# Altium PCB Power_Amplifier.PcbDoc
Units mm, origin at the board's own origin, x right, y up, seen from the top; angles counter-clockwise.
Board outline 101.09 x 78.99 mm, 4 copper layers (Top Layer, Layer 1, Layer 2, Bottom Layer), stack 1.5 mm thick; 51 components, 33 nets, 120 pads, 4 vias.
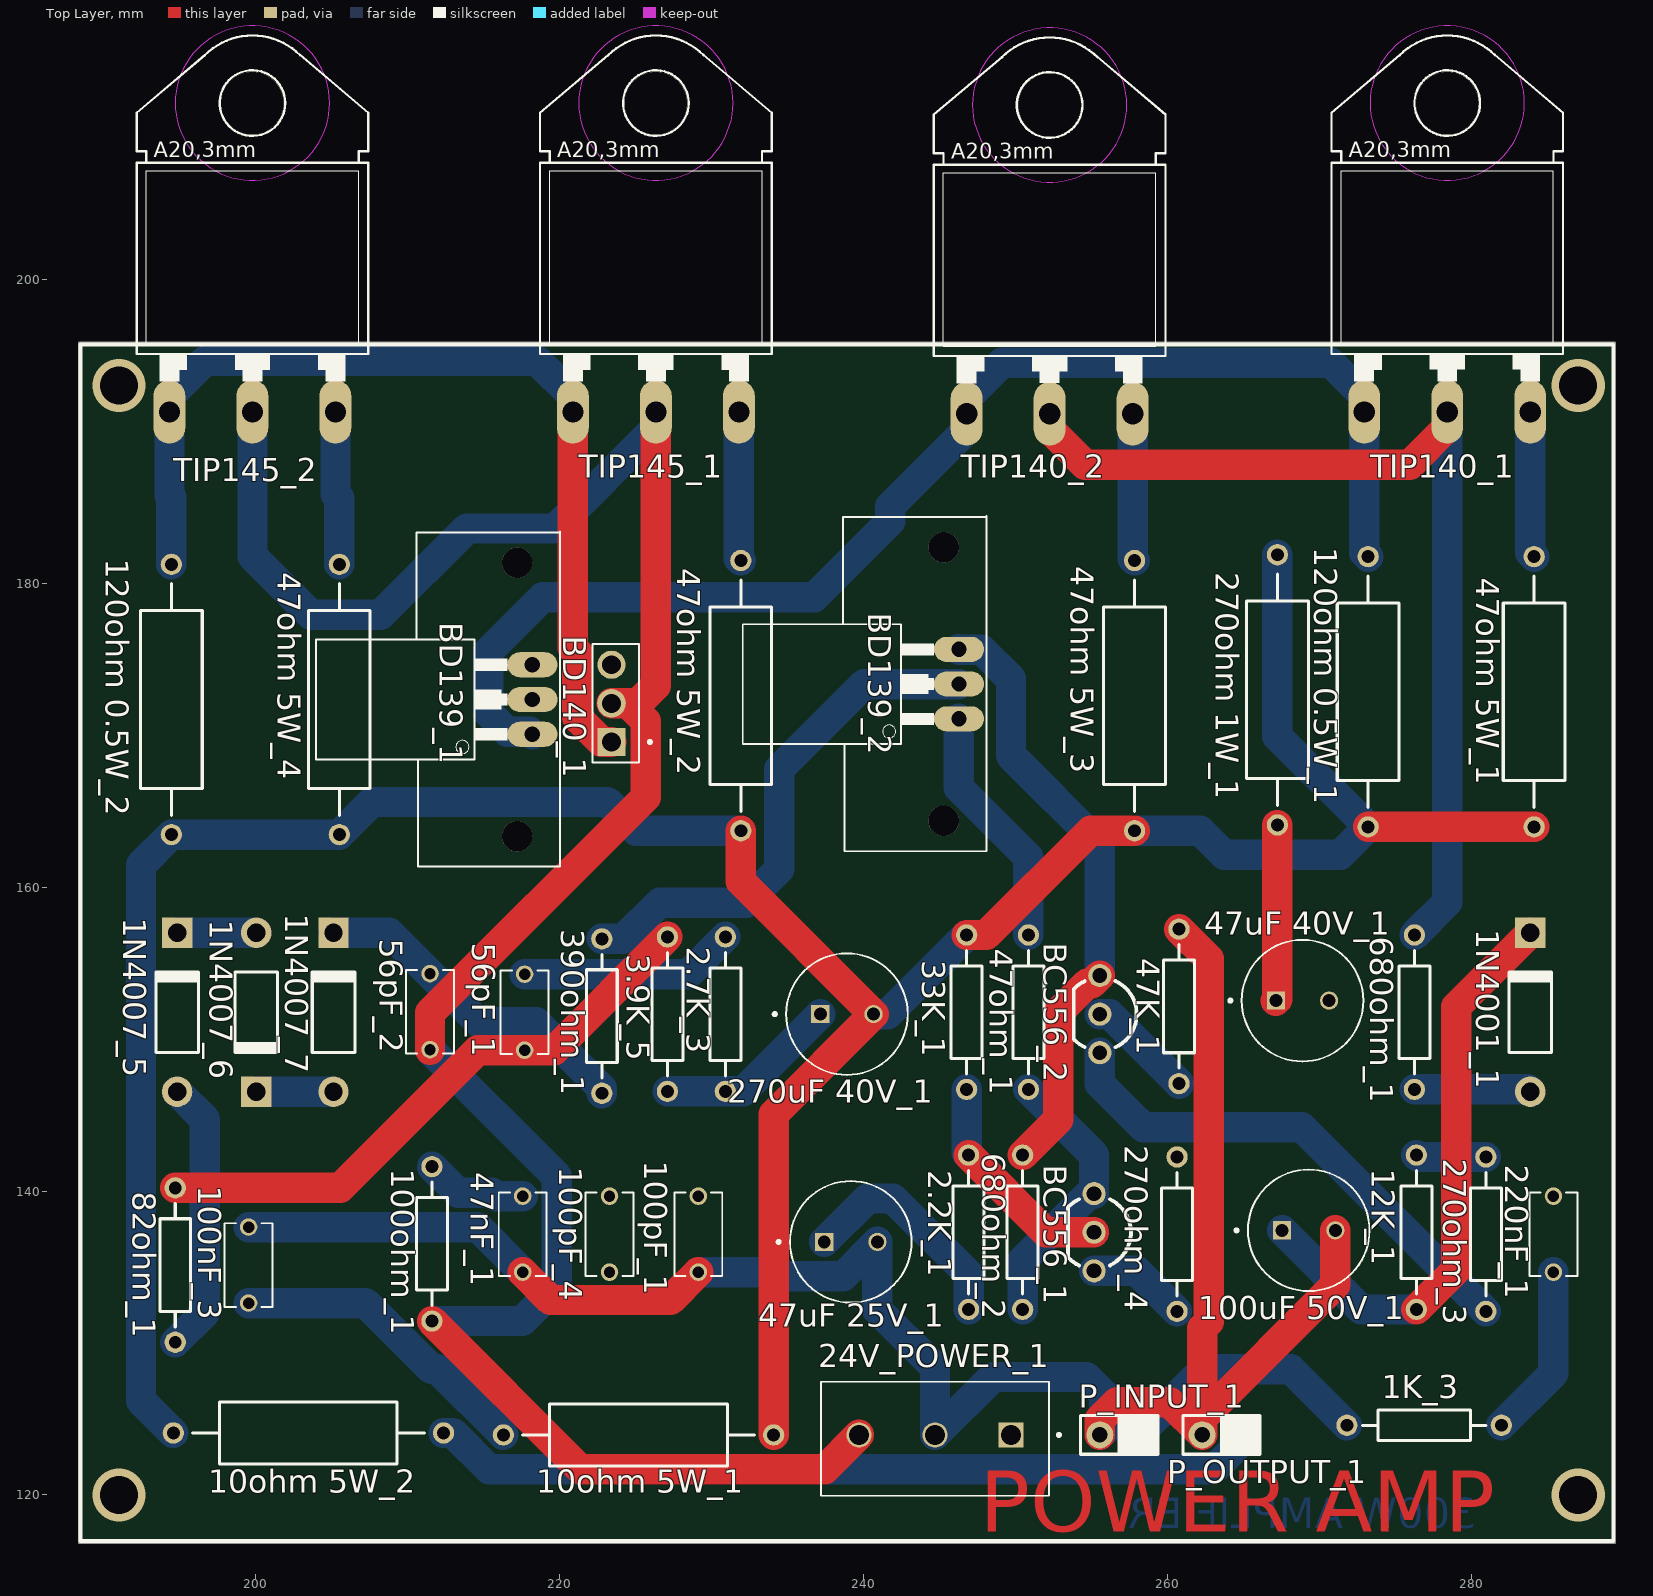
[diagram p0: Top Layer view]
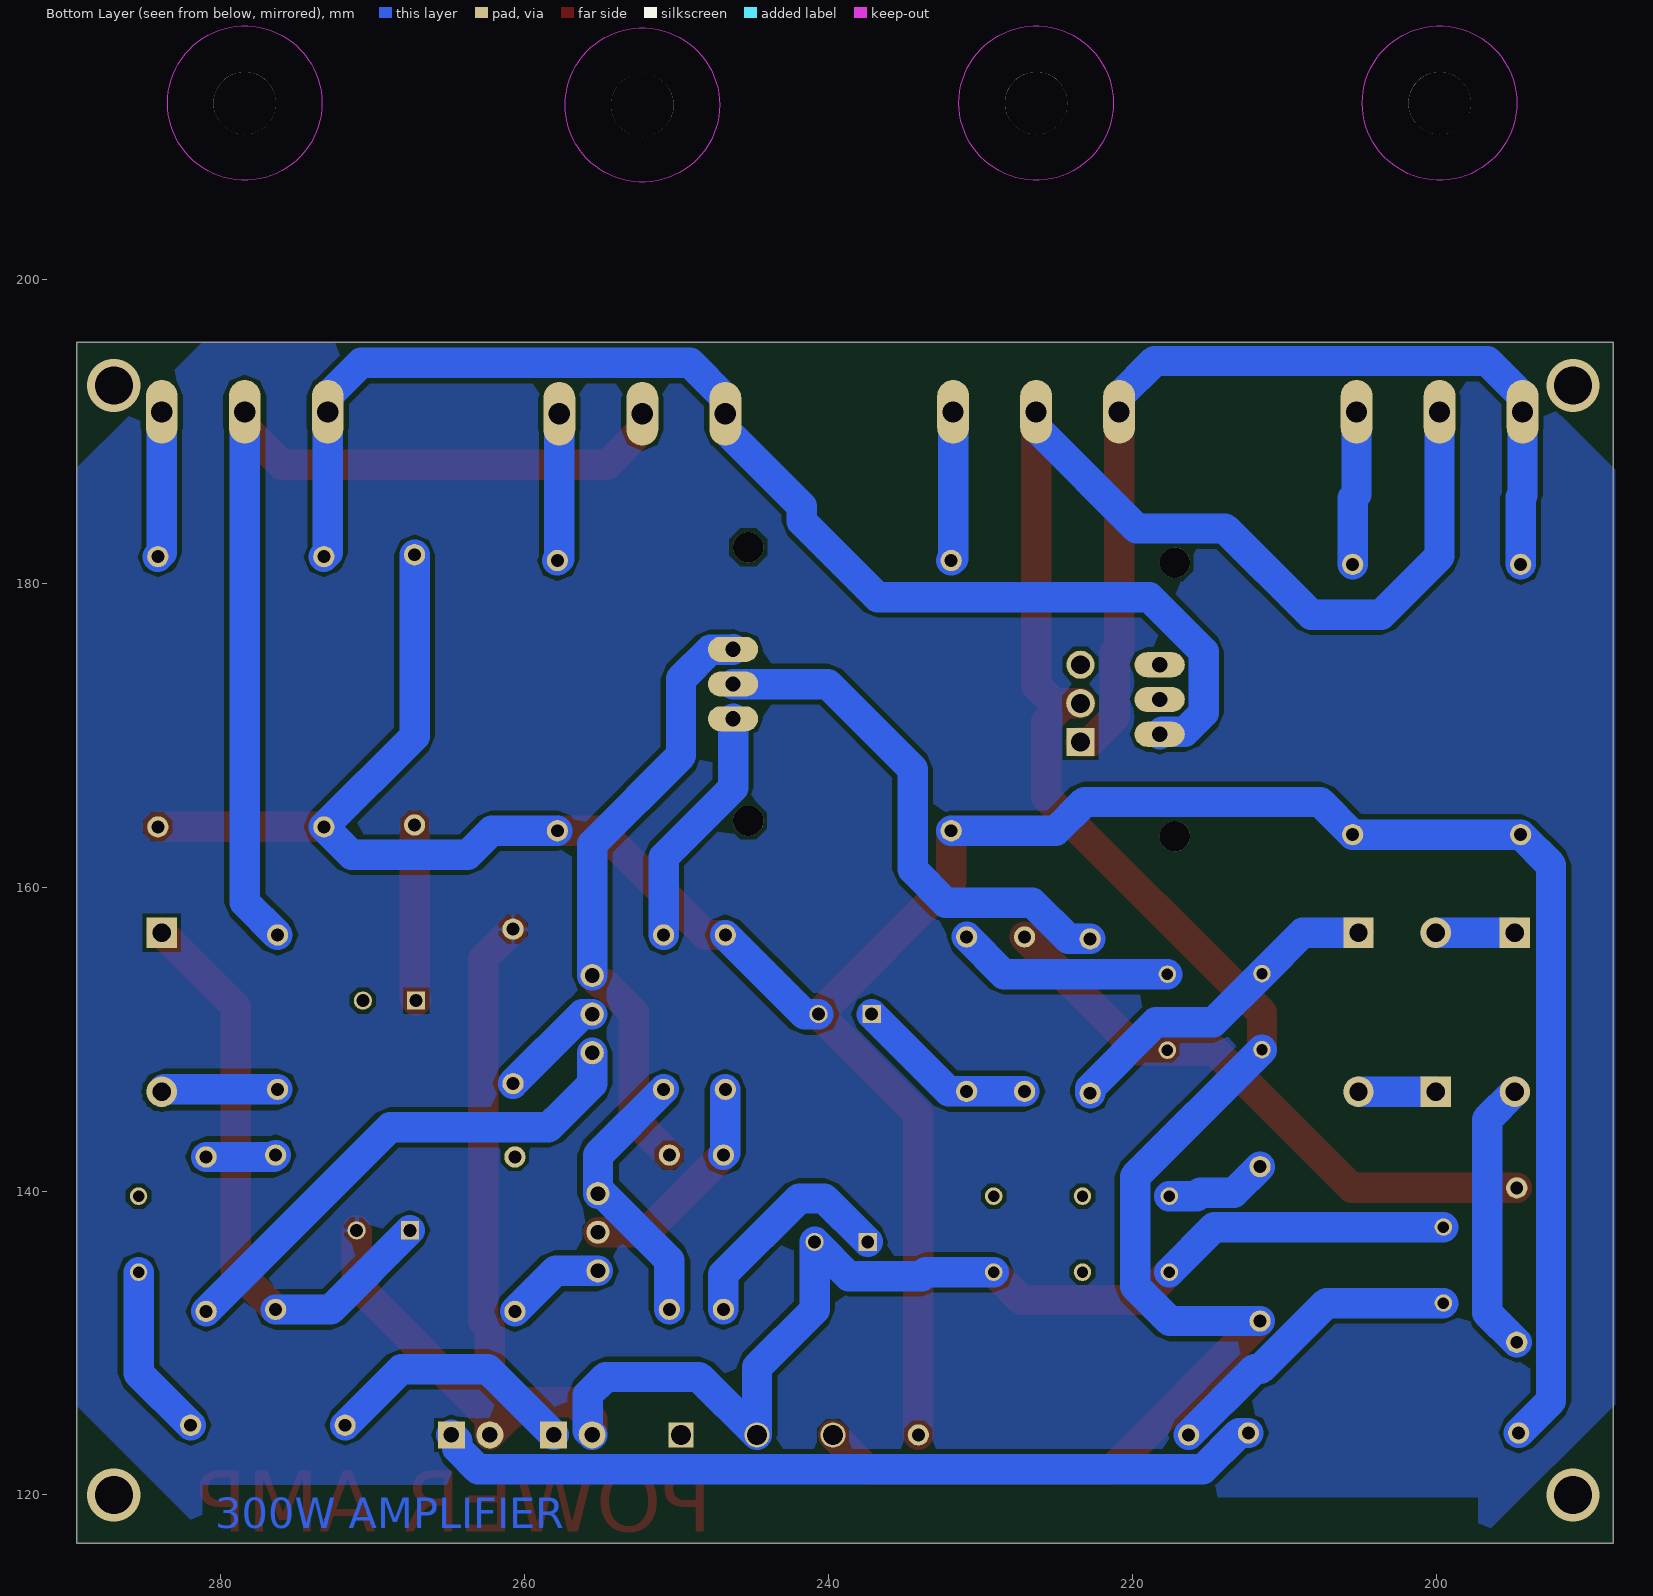
[diagram p1: Bottom Layer view, seen from below]
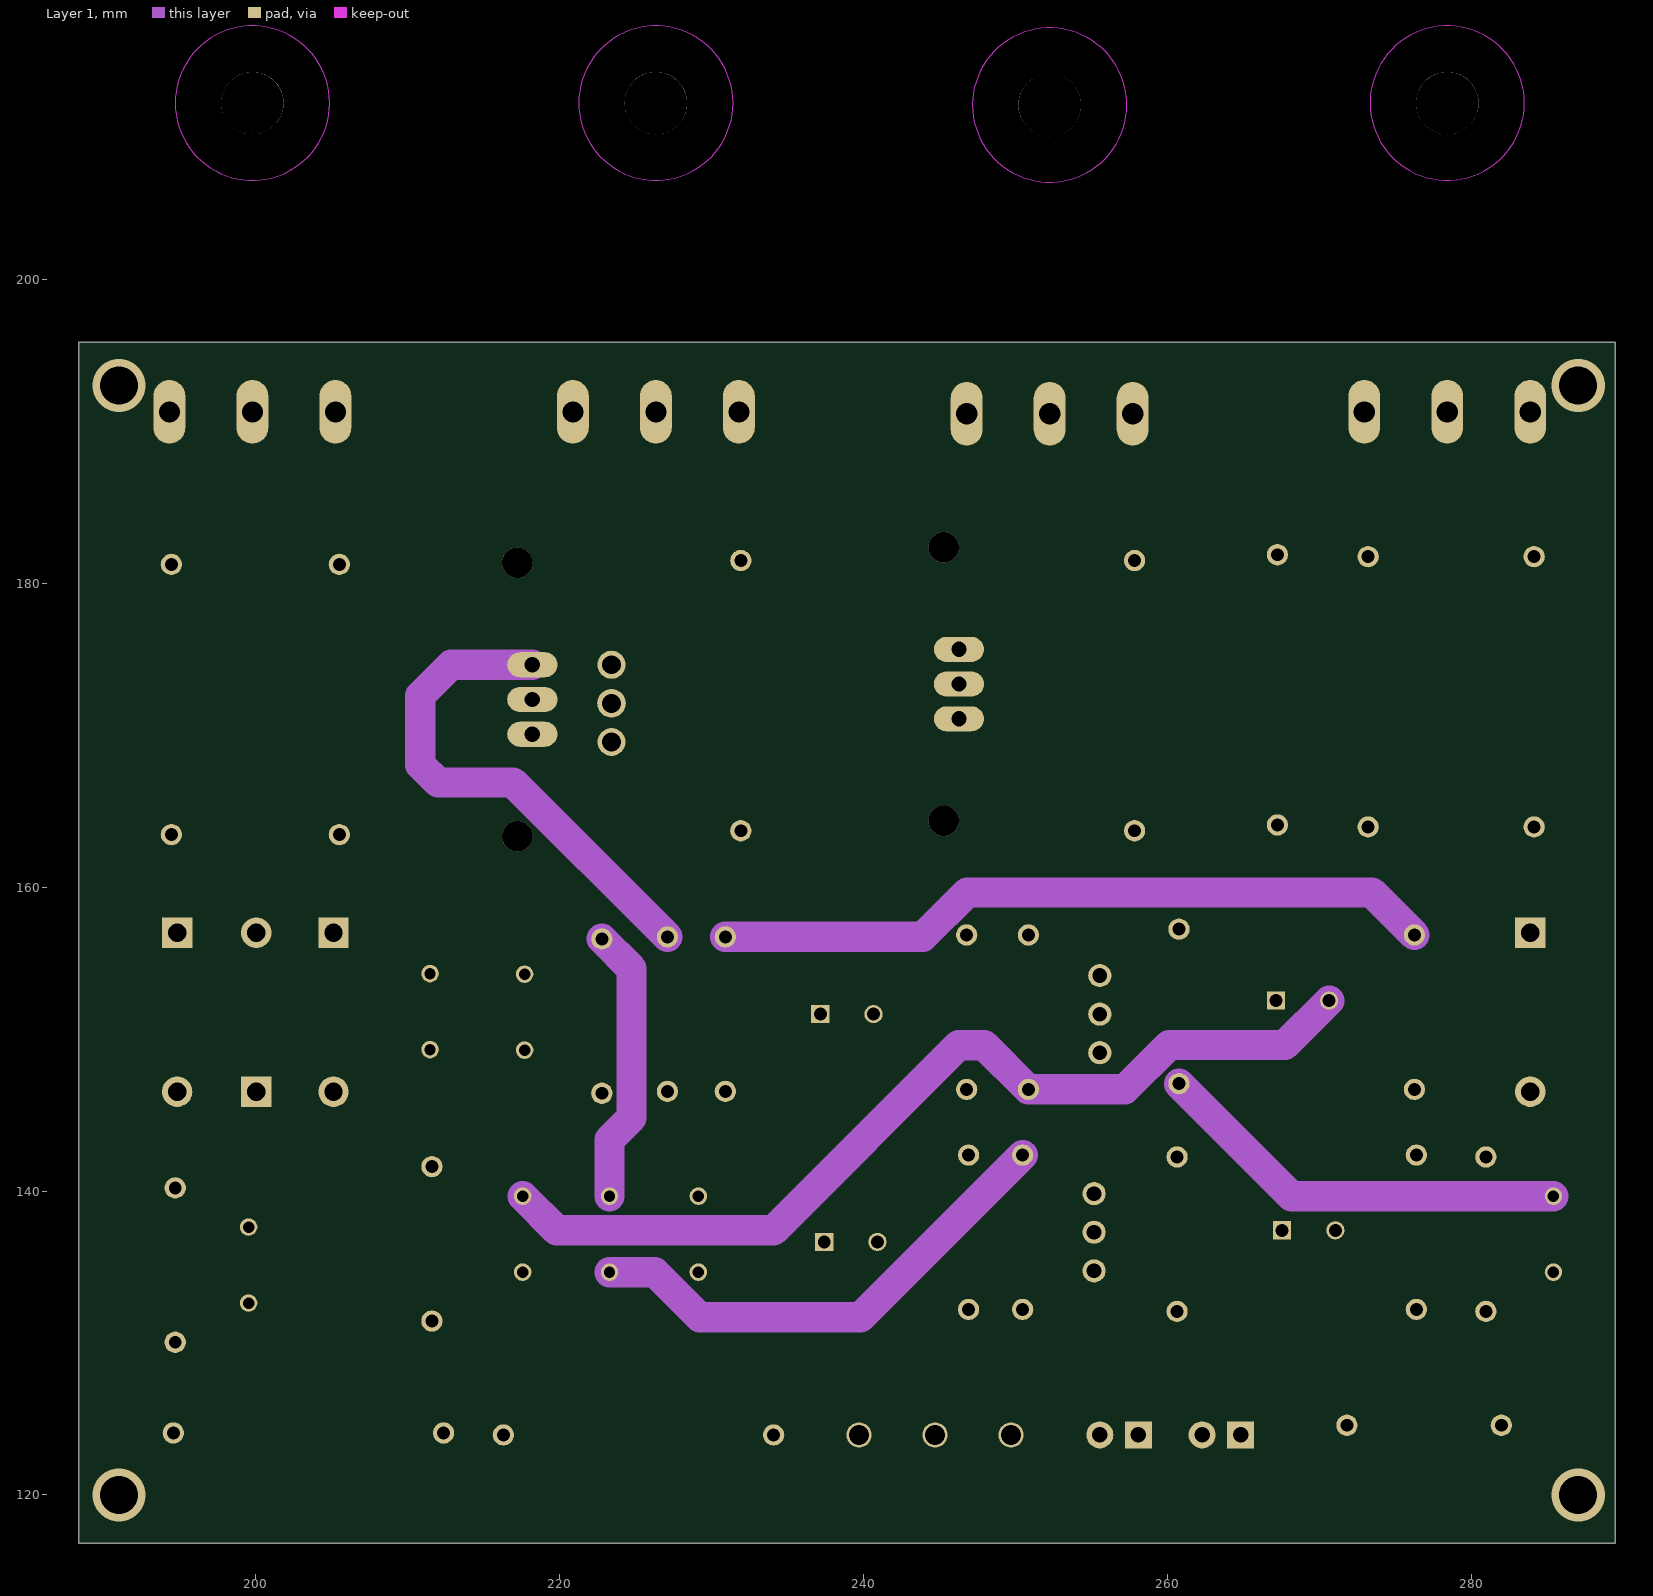
[diagram p2: Layer 1]
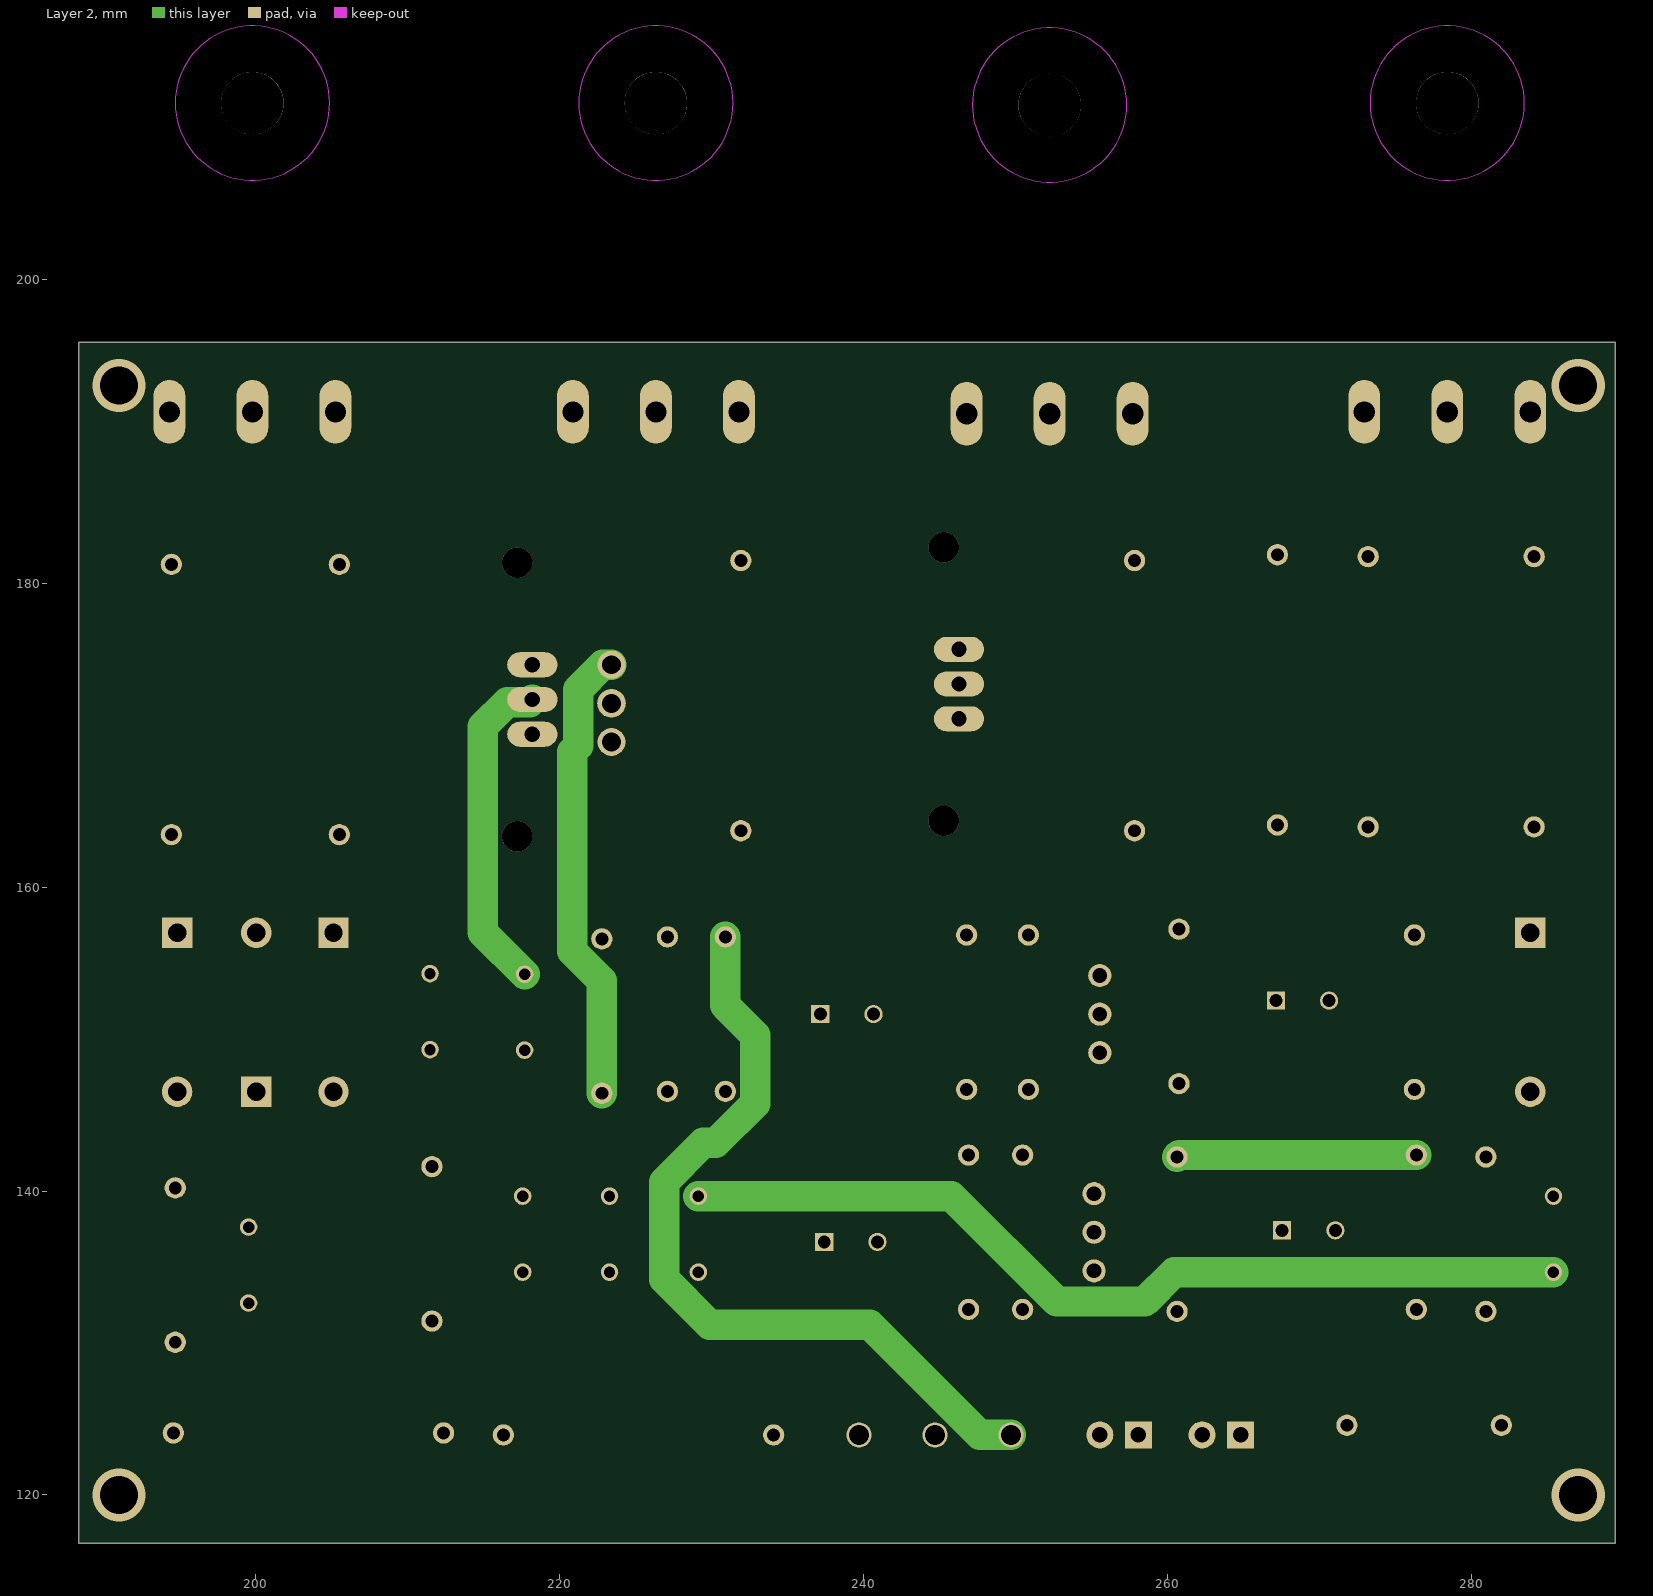
[diagram p3: Layer 2]

## Layer stack, top to bottom
Top Solder: solder mask 0.05, Solder Resist, Dk 3.5
Top Layer: signal copper 0.1
Dielectric 2: prepreg 0.2, PP-006, Dk 4.1
Layer 1: signal copper 0.2
Dielectric 1: dielectric 0.5, FR-4, Dk 4.8
Layer 2: signal copper 0.2
Dielectric 3: prepreg 0.2, PP-006, Dk 4.1
Bottom Layer: signal copper 0.1
Bottom Solder: solder mask 0.05, Solder Resist, Dk 3.5

## Board outline
188.341,116.84 289.433,116.84 289.433,195.834 188.341,195.834

## Design rules (kind name [scope] priority, off if disabled: settings)
Clearance [All] p1: gap=0.254 ignorepadtopadclearanceinfootprint=FALSE except(0: Arc-Hole Track-Hole SMDPad-Hole THPad-Hole Via-Hole Fill-Hole Poly-Hole Region-Hole Text-Hole)
HoleSize [All] p1: absolutevalues=TRUE maxlimit=5 minlimit=0.025 maxpercent=80.000 minpercent=20.000
MinimumSolderMaskSliver [All] p1: minsoldermaskwidth=0
PolygonConnect [All] p1: connectstyle=Relief reliefconductorwidth=0.254 reliefentries=4 polygonreliefangle="90 Angle" airgapwidth=0.254
RoutingVias [All] p1: holewidth=1 width=1.5 viastyle="Through Hole" minholewidth=0.5 minwidth=0.75 maxholewidth=2 maxwidth=2.5
SilkToSilkClearance [All] p1: silktosilkclearance=0
SilkToSolderMaskClearance [IsPad] p1: minsilkscreentomaskgap=0 clearancetoexposedcopper=TRUE
SolderMaskExpansion [All] p1: expansion=0.102 istentingtop=FALSE
Width [All] p1: maxlimit=2 minlimit=2 preferedwidth=2
26 further rules are at their usual default settings.

## Components (designator, comment, footprint, x,y, rotation, side; value= is the part's Value field where it differs from the comment)
1K_3 "Res2" AXIAL-0.4 276.86,124.587 r0 top value=1K
1N4001_1 "Diode 1N4001" DO-41 283.845,151.765 r90 top
1N4007_5 "Diode 1N4007" DO-41 194.818,151.765 r90 top
1N4007_6 "Diode 1N4007" DO-41 200.025,151.765 r270 top
1N4007_7 "Diode 1N4007" DO-41 205.105,151.765 r90 top
2.2K_1 "Res2" AXIAL-0.4 246.888,137.287 r90 top value=2.2K
2.7K_3 "Res2" AXIAL-0.4 230.886,151.638 r90 top value=2.7K
3.9K_5 "Res2" AXIAL-0.4 227.076,151.638 r90 top value=3.9K
"10ohm 5W_1" "Res Adj1" AXIAL-0.7 225.171,123.952 r0 top value=10ohm
"10ohm 5W_2" "Res Adj1" AXIAL-0.7 203.454,124.079 r0 top value=10ohm
12K_1 "Res2" AXIAL-0.4 276.352,137.287 r270 top value=12K
24V_POWER_1 "CTB5000/3" CAMDEN_CTB5000/3 244.682,123.952 r180 top
33K_1 "Res2" AXIAL-0.4 246.761,151.765 r90 top value=33K
47K_1 "Res2" AXIAL-0.4 260.731,152.146 r270 top value=47K
47nF_1 "RDE5C1H273J2M1H03A" CAP_RDE5C1H273J2M1H03A 217.551,137.16 r90 top
"47ohm 5W_1" "Res Adj1" AXIAL-0.7 284.099,172.847 r90 top value=470ohm
"47ohm 5W_2" "Res Adj1" AXIAL-0.7 231.902,172.593 r270 top value=470ohm
"47ohm 5W_3" "Res Adj1" AXIAL-0.7 257.81,172.593 r90 top value=470ohm
"47ohm 5W_4" "Res Adj1" AXIAL-0.7 205.486,172.339 r270 top value=470ohm
47ohm_1 "Res2" AXIAL-0.4 250.825,151.765 r90 top value=47ohm
"47uF 25V_1" "ECA1HM101" CAPPRD350W60D800H1150 239.141,136.652 r0 top
"47uF 40V_1" "ECA1HM101" CAPPRD350W60D800H1150 268.859,152.527 r0 top
56pF_1 "RDE5C1H273J2M1H03A" CAP_RDE5C1H273J2M1H03A 217.678,151.765 r90 top
56pF_2 "RDE5C1H273J2M1H03A" CAP_RDE5C1H273J2M1H03A 211.455,151.805 r90 top
82ohm_1 "Res2" AXIAL-0.4 194.691,135.128 r90 top value=82ohm
100nF_3 "RDE5C1H273J2M1H03A" CAP_RDE5C1H273J2M1H03A 199.517,135.128 r270 top
100ohm_1 "Res2" AXIAL-0.4 211.582,136.525 r270 top value=100ohm
100pF_1 "RDE5C1H273J2M1H03A" CAP_RDE5C1H273J2M1H03A 229.108,137.16 r90 top
100pF_4 "RDE5C1H273J2M1H03A" CAP_RDE5C1H273J2M1H03A 223.266,137.16 r90 top
"100uF 50V_1" "ECA1HM101" CAPPRD350W60D800H1150 269.268,137.414 r0 top
"120ohm 0.5W_1" "Res Adj1" AXIAL-0.7 273.177,172.847 r90 top value=120ohm
"120ohm 0.5W_2" "Res Adj1" AXIAL-0.7 194.437,172.339 r270 top value=120ohm
220nF_1 "RDE5C1H273J2M1H03A" CAP_RDE5C1H273J2M1H03A 285.369,137.16 r90 top
"270ohm 1W_1" "Res Adj1" AXIAL-0.7 267.208,172.974 r90 top value=270ohm
270ohm_3 "Res2" AXIAL-0.4 280.924,137.16 r90 top value=270ohm
270ohm_4 "Res2" AXIAL-0.4 260.604,137.16 r90 top value=270ohm
"270uF 40V_1" "ECA1HM101" CAPPRD350W60D800H1150 238.887,151.638 r0 top
390ohm_1 "Res2" AXIAL-0.4 222.758,151.511 r90 top value=390ohm
680ohm_1 "Res2" AXIAL-0.4 276.225,151.765 r90 top value=680ohm
680ohm_2 "Res2" AXIAL-0.4 250.444,137.287 r90 top value=680ohm
BC556_1 "BC556" TO-92 255.143,137.287 r0 top value={Value}
BC556_2 "BC556" TO-92 255.524,151.638 r0 top value={Value}
BD139_1 "BD139" TO126 213.106,172.339 r90 top
BD139_2 "BD139" TO126 241.173,173.355 r90 top
BD140_1 "BD140" TO245P780X300X1364-3 223.698,172.085 r90 top
P_INPUT_1 "HEADER-1X2" HEADER-1X2 258.064,123.952 r270 top
P_OUTPUT_1 "HEADER-1X2" HEADER-1X2 264.795,123.952 r270 top
TIP140_1 "TIP142" SOT93 278.384,201.422 r0 top (schematic designator TIP142_1)
TIP140_2 "TIP142" SOT93 252.222,201.295 r0 top (schematic designator TIP142_2)
TIP145_1 "TIP147" SOT93 226.314,201.422 r0 top (schematic designator TIP147_1)
TIP145_2 "TIP147" SOT93 199.771,201.422 r0 top (schematic designator TIP147_2)

## Footprints (in the part's own frame and the unit in brackets; to place one, negate y for a bottom-side part, rotate by r counter-clockwise, add the part's x,y. Pads: shape width x height; smd on the part's side, far side on the other; paste and mask are expansions set on the pad)
AXIAL-0.4 [mm] "Axial Device, Thru-Hole; 2 Leads; 0.4 in Pin Spacing"
  round 1.4 hole 0.85: 1(-5.08,0) 2(5.08,0)
  silkscreen extent -4.06,-1.02 4.06,1.02
AXIAL-0.7 [mm] "Axial Device, Thru-Hole; 2 Leads; 0.7 in Pin Spacing"
  round 1.4 hole 0.85: 1(-8.89,0) 2(8.89,0)
  silkscreen extent -7.62,-2.03 7.62,2.03
CAMDEN_CTB5000/3 [mm]
  rect 1.65x1.65 / inner round 1.65 / far side rect 1.65x1.65 hole 1.3: 01(-5,0)
  round 1.65 hole 1.3: 02(0,0) 03(5,0)
  silkscreen extent -8.25,-3.5 7.5,4
CAP_RDE5C1H273J2M1H03A [mm]
  round 1.15 hole 0.75: 1(-2.5,0) 2(2.5,0)
  silkscreen extent -2.75,-1.58 2.75,1.58
CAPPRD350W60D800H1150 [mm]
  round 1.2 hole 0.85: N(1.75,0)
  rect 1.2x1.2 hole 0.85: P(-1.75,0)
  silkscreen extent -4.85,-4 4,4, body extent -4,-4 4,4, height 11.5
DO-41 [mm] "Diode, Axial; Body 5.2 x 2.7 mm (LxDia. max), Lead Dia. 0.86 mm (max)"
  round 2 hole 1.2: 1(-5.23,0)
  rect 2x2 hole 1.2: 2(5.23,0)
  silkscreen extent -2.65,-1.41 2.75,1.4
HEADER-1X2 [mil]
  rect 70x70 hole 40: 1(0,0)
  round 70 hole 40: 2(0,-100)
  silkscreen extent -50,-150 50,50, body extent -50,-150 50,50, height 470
SOT93 [mil]
  oval 82.5x165 hole 55: B(-215,-400) C(0,-400) E(215,-400)
  round 162 hole 162 unplated: ""(0,400)
  Keep-Out Layer circle w0: c0,400 r200
  Keep-Out Layer circle w0: c0,400 r200
  silkscreen extent -300,-320 300,575
TO126 [mm]
  oval 1.651x3.302 hole 1: 1(-2.286,-5.08) 2(0,-5.08) 3(2.286,-5.08)
  round 2 hole 2 unplated: ""(-9,-4.08) ""(9,-4.08)
  silkscreen extent -11,-6.9 11.05,9.14, body extent -3.8,-1.52 3.8,1.14, height 13.2
TO245P780X300X1364-3 [mm]
  rect 1.85x1.85 / inner round 1.85 / far side rect 1.85x1.85 hole 1.23: 1(-2.54,0.305)
  round 1.88 hole 1.25: 2(0,0.305)
  round 1.85 hole 1.23: 3(2.54,0.305)
  silkscreen extent -3.9,-2.32 3.9,1.56
TO-92 [mil]
  round 60 hole 38: 1(0,100) 2(0,0) 3(0,-100)
  silkscreen extent -68,-86 95,86, body extent -63,-110 93,110, height 217

## Part data
1K_3 2.2K_1 2.7K_3 3.9K_5 12K_1 33K_1 47K_1 47ohm_1 82ohm_1 100ohm_1 270ohm_3 270ohm_4 390ohm_1 680ohm_1 680ohm_2: "Resistor", LatestRevisionDate=17-Jul-2002, LatestRevisionNote="Re-released for DXP Platform.", PackageDescription="Axial Device, Thru-Hole; 2 Leads; 0.4 in Pin Spacing", PackageReference=AXIAL-0.4, Published=8-Jun-2000, Publisher="Altium Limited"
1N4001_1 1N4007_5 1N4007_6 1N4007_7: "1 Amp General Purpose Rectifier", Code_JEDEC=DO-204-AL, ComponentLink1Description="Manufacturer Link", ComponentLink1URL=http://www.fairchildsemi.com/, ComponentLink2Description=Datasheet, ComponentLink2URL=http://www.fairchildsemi.com/ds/1N%2F1N4001.pdf, DatasheetVersion=1998, LatestRevisionDate=17-Jul-2002, LatestRevisionNote="Re-released for DXP Platform.", PackageDescription="Diode, Axial; Body 5.2 x 2.7 mm (LxDia. max), Lead Dia. 0.86 mm (max)", PackageReference=DO-41, PackageVersion=Aug-1999, Published=8-Jun-2000, Publisher="Altium Limited"
"10ohm 5W_1" "10ohm 5W_2" "47ohm 5W_1" "47ohm 5W_2" "47ohm 5W_3" "47ohm 5W_4" "120ohm 0.5W_1" "120ohm 0.5W_2" "270ohm 1W_1": "Variable Resistor", LatestRevisionDate=17-Jul-2002, LatestRevisionNote="Re-released for DXP Platform.", PackageDescription="Axial Device, Thru-Hole; 2 Leads; 0.7 in Pin Spacing", PackageReference=AXIAL-0.7, Published=8-Jun-2000, Publisher="Altium Limited", Set Position=0.5
24V_POWER_1: Package=None, Availability=Unavailable, MP=CTB5000/3, Price=None
47nF_1 56pF_1 56pF_2 100nF_3 100pF_1 100pF_4 220nF_1: "Lead Capacitor C0G_EIA_ with Capacitance: 27000pF and Rated Voltage: 50Vdc", Package=NONSTANDARD, Availability=Unavailable, MF=Murata, MP=RDE5C1H273J2M1H03A, Price=None, SnapEDA_Link=https://www.snapeda.com/parts/RDE5C1H273J2M1H03A/Murata/view-part/4544923/?ref=snap
"47uF 25V_1" "47uF 40V_1" "100uF 50V_1" "270uF 40V_1": "100ÂµF 50V Aluminum Electrolytic Capacitors Radial, Can 2000 Hrs @ 85Â°C", Package="RADIAL-2 Panasonic", Availability="No availability data", Check_prices=https://www.snapeda.com/parts/ECA1HM101/Panasonic/view-part/4478734/?ref=eda, MF=Panasonic, MP=ECA1HM101, Price=None, SnapEDA_Link=https://www.snapeda.com/parts/ECA1HM101/Panasonic/view-part/4478734/?ref=snap
BD139_1 BD139_2: "Bipolar (BJT) Transistor NPN 80 V 1.5 A - 1.25 W Through Hole TO-126-3", Package="TO-225-3 ON Semiconductor", Availability="In Stock", Check_prices=https://www.snapeda.com/parts/BD139/Onsemi/view-part/?ref=eda, MF="ON Semiconductor", MP=BD139, Price=None, Purchase-URL=https://pricing.snapeda.com/search/part/BD139/?ref=eda, SnapEDA_Link=https://www.snapeda.com/parts/BD139/Onsemi/view-part/?ref=snap
BD140_1: "à¸—à¸£à¸²à¸™à¸‹à¸´à¸ªà¹€à¸•à¸­à¸£à¹Œà¸ªà¸­à¸‡à¸‚à¸±à¹‰à¸§ (BJT) PNP 80 V 1.5 A - 1.25 W à¸—à¸°à¸¥à¸¸à¸œà¹ˆà¸²à¸™à¸£à¸¹ TO-126-3", Package="TO-126 Multicomp", Availability="In Stock", Check_prices=https://www.snapeda.com/parts/BD140/Onsemi/view-part/?ref=eda, MF=ON, MP=BD140, Price=None, Purchase-URL=https://pricing.snapeda.com/search/part/BD140/?ref=eda, SnapEDA_Link=https://www.snapeda.com/parts/BD140/Onsemi/view-part/?ref=snap
P_INPUT_1 P_OUTPUT_1: Supplier Part Number 1=S1011E-36-ND, REEL=TH, Supplier 1=Digi-Key
TIP140_1 TIP140_2: "Bipolar _BJT_ Transistor NPN - Darlington 100V 10A 125W Through Hole TO-247-3", Package="TO-247 ON Semiconductor", Availability=Unavailable, MF="ON Semiconductor", MP=TIP142, Price=None, SnapEDA_Link=https://www.snapeda.com/parts/TIP142/ON%20Semiconductor/view-part/2674398/?ref=snap
TIP145_1 TIP145_2: "Bipolar _BJT_ Transistor PNP 100V 10A 125W Through Hole TO-218", Package="TO-247 ON Semiconductor", Availability=Unavailable, MF="ON Semiconductor", MP=TIP147, Price=None, SnapEDA_Link=https://www.snapeda.com/parts/TIP147/ON%20Semiconductor/view-part/2712411/?ref=snap

## Via types
v1: diameter 3.5, hole 2.5, Top Layer to Bottom Layer, 4 vias

## Nets (pads, with @x,y where several pads share a name; then routed paths per layer and width w, separated by ;. In a path a pad name is that pad's centre, name@x,y a point inside that pad or via, vN(x,y) a via of type N, cw(c..) or ccw(c..) an arc to the next point about the centre after c; other vN are vias at no path point)
GND: 24V_POWER_1.02 47K_1.1 47nF_1.1 100nF_3.1 100pF_1.1 "47uF 25V_1.N" "100uF 50V_1.N" P_INPUT_1.2 P_OUTPUT_1.2 | length 134.7
  Top Layer w2: 47nF_1.1 219.38,132.831 227.279,132.831 100pF_1.1 ; P_INPUT_1.2 255.524,124.963 256.656,126.095 260.112,126.095 P_OUTPUT_1.2 262.255,125.05 ; 47K_1.1 262.685,155.272 262.685,131.398 262.255,130.968 262.255,125.05 ; 271.018,137.414 271.018,133.813 262.255,125.05
  Bottom Layer w2: 100nF_3.1 214.583,137.628 47nF_1.1 ; 100pF_1.1 233.585,134.66 233.847,134.398 238.637,134.398 240.891,136.652 240.891,132.198 244.682,128.407 24V_POWER_1.02 248.492,127.762 254.638,127.762 255.81,126.59 255.81,124.238 P_INPUT_1.2
Net1K_3_1: 1K_3.1 P_INPUT_1.1 | length 17
  Bottom Layer w2: P_INPUT_1.1 262.382,128.27 268.097,128.27 1K_3.1
Net1K_3_2: 1K_3.2 100pF_1.2 220nF_1.1 | length 71.4
  Layer 2 w2: 100pF_1.2 245.754,139.66 252.683,132.731 258.492,132.731 260.421,134.66 220nF_1.1
  Bottom Layer w2: 1K_3.2 285.369,128.016 220nF_1.1
Net1N4001_1_1: 1N4001_1.1 680ohm_1.1 | length 7.7
  Bottom Layer w2: 680ohm_1.1 283.695,146.685 1N4001_1.1
Net1N4001_1_2: 1N4001_1.2 12K_1.2 "100uF 50V_1.P" | length 38.9
  Top Layer w2: 12K_1.2 278.97,134.825 278.97,152.12 1N4001_1.2
  Bottom Layer w2: 267.518,137.414 272.725,132.207 12K_1.2
Net1N4007_5_1: 1N4007_5.1 82ohm_1.1 | length 18.1
  Bottom Layer w2: 82ohm_1.1 196.645,132.002 196.645,144.708 1N4007_5.1
Net1N4007_5_2: 1N4007_5.2 1N4007_6.1 | length 5.2
  Bottom Layer w2: 1N4007_5.2 1N4007_6.1
Net1N4007_6_2: 1N4007_6.2 1N4007_7.1 | length 5.1
  Bottom Layer w2: 1N4007_6.2 1N4007_7.1
Net1N4007_7_2: 1N4007_7.2 56pF_2.2 390ohm_1.1 BD140_1.3 | length 52.6
  Layer 2 w2: 390ohm_1.1 222.758,153.828 220.804,155.782 220.804,168.905 221.199,169.3 221.199,172.994 222.83,174.625 BD140_1.3
  Bottom Layer w2: 1N4007_7.2 208.765,156.995 56pF_2.2 214.666,151.094 218.436,151.094 222.758,146.772 390ohm_1.1
Net2.2K_1_1: 2.2K_1.1 "47uF 25V_1.P" | length 15.1
  Bottom Layer w2: 237.391,136.652 240.25,139.511 241.906,139.511 246.888,134.529 2.2K_1.1
Net2.2K_1_2: 2.2K_1.2 33K_1.1 BC556_1.2 | length 14.7
  Top Layer w2: 2.2K_1.2 251.968,137.287 BC556_1.2
  Bottom Layer w2: 33K_1.1 246.761,142.494 2.2K_1.2
Net2.7K_3_1: 2.7K_3.1 3.9K_5.1 "270uF 40V_1.P" | length 12.2
  Bottom Layer w2: 3.9K_5.1 2.7K_3.1 232.057,146.558 237.137,151.638
Net2.7K_3_2: 2.7K_3.2 24V_POWER_1.01 56pF_1.2 680ohm_1.2 BD139_1.2 TIP140_1.C TIP140_2.C | length 202.2
  Top Layer w2: TIP140_2.C 252.222,190.113 254.55,187.785 275.929,187.785 278.384,190.24 TIP140_1.C
  Layer 1 w2: 2.7K_3.2 243.871,156.718 246.792,159.639 273.431,159.639 680ohm_1.2
  Layer 2 w2: 56pF_1.2 214.932,157.011 214.932,170.565 216.531,172.164 218.011,172.164 BD139_1.2 ; 2.7K_3.2 230.886,152.21 232.84,150.256 232.84,145.749 230.263,143.171 229.431,143.171 226.854,140.594 226.854,134.207 229.87,131.191 240.383,131.191 247.622,123.952 24V_POWER_1.01
  Bottom Layer w2: 56pF_1.2 228.433,154.265 2.7K_3.2 ; 680ohm_1.2 278.384,159.004 TIP140_1.C
Net3.9K_5_2: 3.9K_5.2 56pF_1.1 82ohm_1.2 BD139_1.3 | length 72.9
  Top Layer w2: 82ohm_1.2 205.546,140.208 214.603,149.265 56pF_1.1 219.623,149.265 3.9K_5.2
  Layer 1 w2: BD139_1.3 212.852,174.625 210.82,172.593 210.82,168.05 211.992,166.878 216.916,166.878 3.9K_5.2
"Net10ohm 5W_1_1": 100nF_3.2 "10ohm 5W_1.1" | length 20.4
  Bottom Layer w2: 100nF_3.2 207.211,132.628 211.549,128.29 211.943,128.29 216.281,123.952
"Net10ohm 5W_1_2": 33K_1.2 "10ohm 5W_1.2" "10ohm 5W_2.1" "47ohm 5W_1.1" "47ohm 5W_2.2" "47ohm 5W_3.1" "47ohm 5W_4.2" "120ohm 0.5W_1.1" "120ohm 0.5W_2.2" "270ohm 1W_1.2" "270uF 40V_1.N" | length 196.6
  Top Layer w2: 231.902,163.703 231.902,160.373 240.637,151.638 234.061,145.062 234.061,123.952 ; 33K_1.2 248.062,156.845 254.92,163.703 257.81,163.703 ; 273.177,163.957 284.099,163.957
  Bottom Layer w2: 194.564,124.079 192.437,126.206 192.437,161.449 194.437,163.449 205.486,163.449 207.63,165.593 223.132,165.593 225.022,163.703 231.902,163.703 ; 240.637,151.638 241.554,151.638 33K_1.2 ; 257.81,163.703 262.127,163.703 263.7,162.13 271.35,162.13 273.177,163.957 267.208,169.926 267.208,181.864
"Net10ohm 5W_2_2": "10ohm 5W_2.2" P_OUTPUT_1.1 | length 54.7
  Bottom Layer w2: 212.344,124.079 212.966,124.079 215.347,121.698 263.032,121.698 264.398,123.064 264.398,123.555 P_OUTPUT_1.1
Net12K_1_1: 12K_1.1 270ohm_3.2 270ohm_4.2 | length 20.4
  Layer 2 w2: 270ohm_4.2 260.731,142.367 12K_1.1
  Bottom Layer w2: 12K_1.1 276.479,142.24 270ohm_3.2
Net24V_POWER_1_03: 24V_POWER_1.03 56pF_2.1 100ohm_1.2 BD140_1.2 TIP145_1.C TIP145_2.C | length 155.6
  Top Layer w2: 56pF_2.1 211.455,151.718 225.647,165.91 225.647,170.914 224.476,172.085 ; 100ohm_1.2 221.329,121.698 237.428,121.698 24V_POWER_1.03 ; BD140_1.2 224.476,172.085 ; TIP145_1.C 226.314,173.257 225.142,172.085 224.476,172.085
  Bottom Layer w2: TIP145_2.C 199.771,181.766 203.61,177.927 208.219,177.927 213.885,183.593 219.693,183.593 226.314,190.214 TIP145_1.C ; 56pF_2.1 219.805,140.955 219.805,133.726 217.524,131.445 100ohm_1.2
Net47K_1_2: 47K_1.2 220nF_1.2 BC556_2.2 | length 34.8
  Layer 1 w2: 47K_1.2 268.137,139.66 220nF_1.2
  Bottom Layer w2: BC556_2.2 256.172,151.638 260.731,147.079 47K_1.2
Net47nF_1_2: 47nF_1.2 47ohm_1.1 100ohm_1.1 680ohm_2.1 "47uF 40V_1.N" BC556_1.1 | length 87.8
  Layer 1 w2: 47nF_1.2 219.805,137.406 234.053,137.406 246.25,149.603 247.907,149.603 47ohm_1.1 257.162,146.685 260.083,149.606 267.688,149.606 270.609,152.527
  Bottom Layer w2: 100ohm_1.1 213.305,139.882 215.517,139.882 215.739,139.66 47nF_1.2 ; 680ohm_2.1 250.444,135.439 254.832,139.827 BC556_1.1 255.143,142.367 47ohm_1.1
"Net47ohm 5W_1_2": "47ohm 5W_1.2" TIP140_1.E | length 9.6
  Bottom Layer w2: TIP140_1.E 283.845,181.991 284.099,181.737
"Net47ohm 5W_2_1": "47ohm 5W_2.1" TIP145_1.E | length 9.8
  Bottom Layer w2: TIP145_1.E 231.775,181.61 231.902,181.483
"Net47ohm 5W_3_2": "47ohm 5W_3.2" TIP140_2.E | length 9.7
  Bottom Layer w2: TIP140_2.E 257.683,181.61 257.81,181.483
"Net47ohm 5W_4_1": "47ohm 5W_4.1" TIP145_2.E | length 10.1
  Bottom Layer w2: TIP145_2.E 205.232,185.836 205.486,185.582 205.486,181.229
Net47ohm_1_2: 47ohm_1.2 BD139_2.1 | length 16.1
  Bottom Layer w2: BD139_2.1 246.253,166.543 250.825,161.971 47ohm_1.2
"Net47uF 40V_1_P": "47uF 40V_1.P" "270ohm 1W_1.1" | length 11.6
  Top Layer w2: 267.109,152.527 267.208,152.626 267.208,164.084
Net100pF_4_1: 100pF_4.1 680ohm_2.2 BC556_2.1 BD139_2.3 | length 73.1
  Top Layer w2: 680ohm_2.2 252.779,144.702 252.779,151.744 254.689,153.654 255,153.654 BC556_2.1
  Layer 1 w2: 100pF_4.1 226.231,134.66 229.191,131.699 239.776,131.699 680ohm_2.2
  Bottom Layer w2: BD139_2.3 246.285,175.609 247.765,175.609 249.682,173.692 249.682,168.656 255.524,162.814 BC556_2.1
Net100pF_4_2: 100pF_4.2 390ohm_1.2 BD139_2.2 | length 52.6
  Layer 1 w2: 390ohm_1.2 224.712,154.637 224.712,144.824 223.266,143.377 100pF_4.2
  Bottom Layer w2: 390ohm_1.2 224.186,156.591 226.567,158.972 232.251,158.972 234.442,161.163 234.442,167.767 240.03,173.355 BD139_2.2
"Net120ohm 0.5W_1_2": "120ohm 0.5W_1.2" BD139_1.1 TIP140_1.B TIP140_2.B | length 86.4
  Bottom Layer w2: BD139_1.1 218.011,170.228 216.531,170.228 215.281,171.478 215.281,175.486 218.865,179.07 236.728,179.07 241.735,184.077 241.735,185.062 246.761,190.087 TIP140_2.B 246.761,192.157 249.089,194.485 270.722,194.485 272.923,192.284 TIP140_1.B 272.923,181.991 273.177,181.737
"Net120ohm 0.5W_2_1": "120ohm 0.5W_2.1" BD140_1.1 TIP145_1.B TIP145_2.B | length 63.7
  Top Layer w2: TIP145_1.B 220.853,175.724 221.139,175.438 221.139,171.151 222.745,169.545 BD140_1.1
  Bottom Layer w2: 194.437,181.229 194.437,185.645 194.31,185.772 TIP145_2.B 194.31,192.284 196.638,194.612 218.525,194.612 220.853,192.284 TIP145_1.B
Net270ohm_3_1: 270ohm_3.1 BC556_2.3 | length 33.6
  Bottom Layer w2: BC556_2.3 255.524,147.066 257.303,145.287 258.396,144.194 268.81,144.194 270ohm_3.1
Net270ohm_4_1: 270ohm_4.1 BC556_1.3 | length 6.6
  Bottom Layer w2: BC556_1.3 257.937,134.747 270ohm_4.1
pads on no net: BD139_1. BD139_2. TIP140_1. TIP140_2. TIP145_1. TIP145_2.
copper on no net:
  other v1: 191,120 287,120 191,193 287,193

## Polygon pours and split planes (outlines as drawn)
GND on Bottom Layer "GND_L04_P005" (solid, remove dead copper, pour order 5): 188.214,187.452 196.596,195.834 281.178,195.834 289.433,187.579 289.433,125.857 280.416,116.84 197.358,116.84 188.214,125.984 188.214,187.579

## Other copper
Top Layer:
  text "POWER AMP" at 247.634,117.586 h4
Bottom Layer:
  text "300W AMPLIFIER" at 280.324,117.821 h2
Multi-Layer:
  text "PRABHASHANA_ENTC" at 197.785,117.775 h1.52

## Silkscreen, mask and mechanical layers (free items; w line width, h text height)
Top Overlay:
  lines w0.254: 188.468,116.967 188.468,195.707 289.306,195.707 289.306,116.967 188.468,116.967
Mechanical 1:
  lines w0.254: 188.468,116.967 188.468,195.707 289.306,195.707 289.306,116.967 188.468,116.967

## Text inside footprints (layer, text, board x,y; h text height)
BD139_1: Mechanical 13 "1" at 213.995,169.799 h1.27 r90; Mechanical 13 "2" at 213.995,171.831 h1.27 r90; Mechanical 13 "3" at 213.995,174.117 h1.27 r90
BD139_2: Mechanical 13 "1" at 242.062,170.815 h1.27 r90; Mechanical 13 "2" at 242.062,172.847 h1.27 r90; Mechanical 13 "3" at 242.062,175.133 h1.27 r90
TIP140_1: Top Overlay "A20,3mm" at 271.901,208.032 h1.02
TIP140_2: Top Overlay "A20,3mm" at 245.739,207.905 h1.02
TIP145_1: Top Overlay "A20,3mm" at 219.832,208.031 h1.02
TIP145_2: Top Overlay "A20,3mm" at 193.289,208.031 h1.02